# Altium PCB praline.PcbDoc (part 3 of 6)
Units mm, origin at the board's own origin, x right, y up, seen from the top; angles counter-clockwise.
Board outline 120 x 75 mm, 6 copper layers (F.Cu, In1.Cu, In2.Cu, In3.Cu, In4.Cu, B.Cu); 576 components, 429 nets, 2806 pads, 953 vias.
Unrouted connection lines stored in the file: 268.
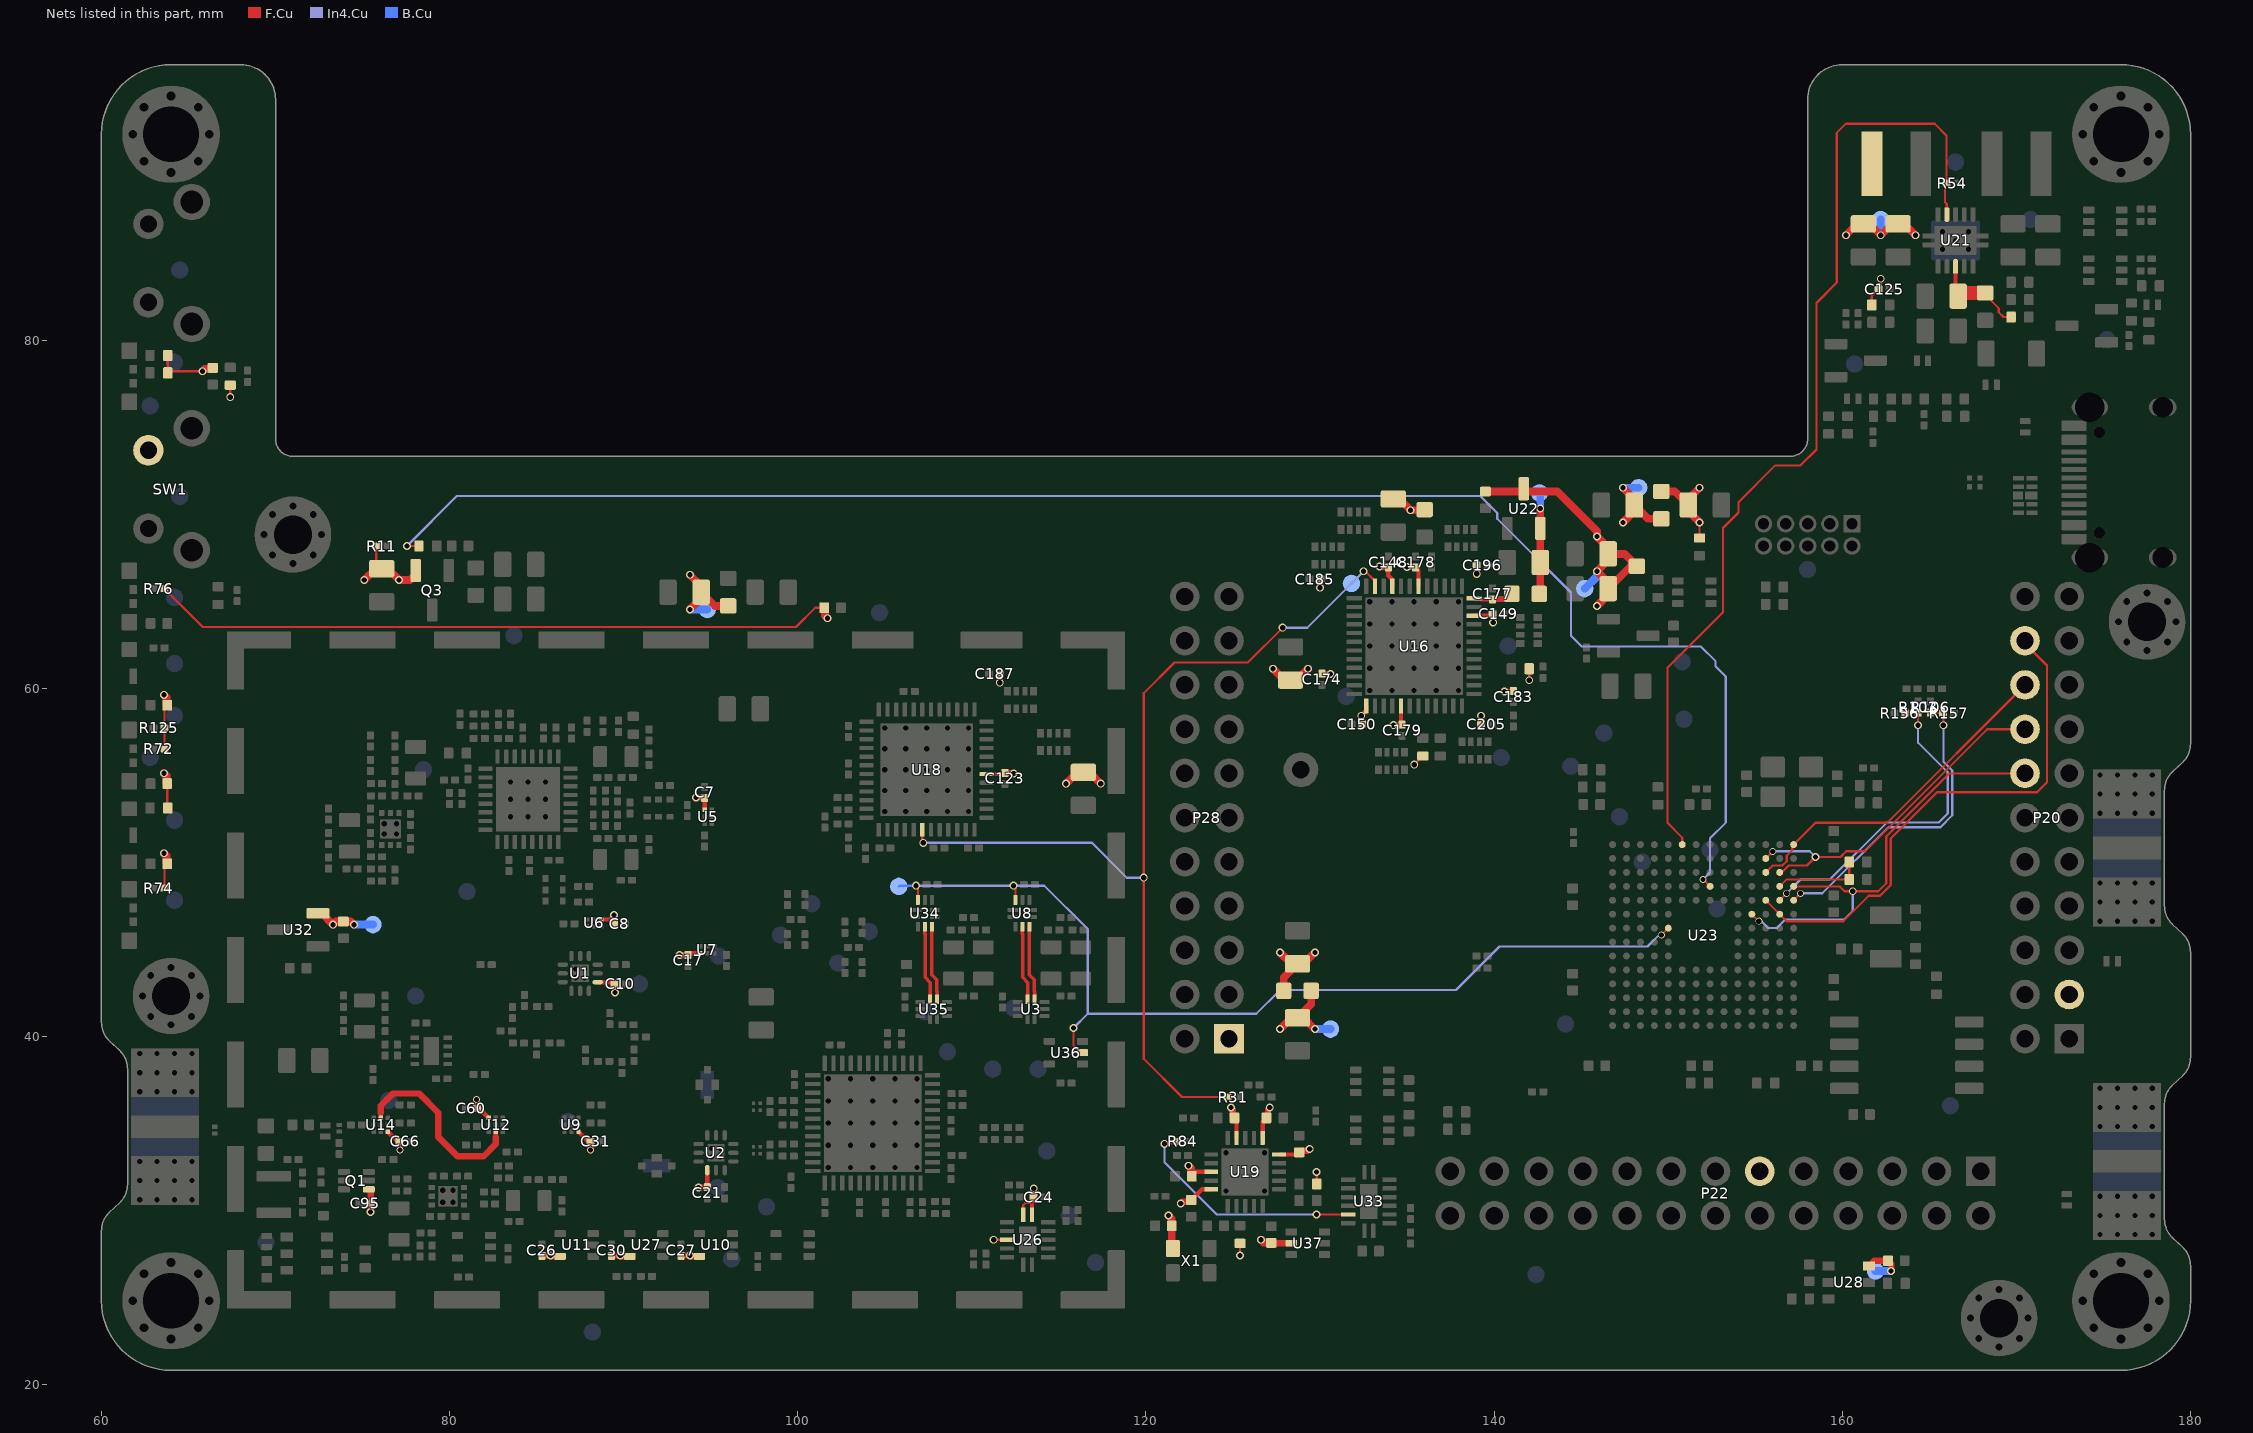
[diagram p6: the nets of this part, all layers, seen from the top]

## Via types
v1: diameter 0.45, hole 0.3, F.Cu to B.Cu, tented both sides, 751 vias
v2: diameter 0.4, hole 0.3, F.Cu to B.Cu, tented both sides, 119 vias
v3: diameter 0.7, hole 0.4, F.Cu to B.Cu, tented both sides, 83 vias

## Nets (pads, with @x,y where several pads share a name; then routed paths per layer and width w, separated by ;. In a path a pad name is that pad's centre, name@x,y a point inside that pad or via, vN(x,y) a via of type N, cw(c..) or ccw(c..) an arc to the next point about the centre after c; other vN are vias at no path point) (continued)
AMP_BYPASS: U12.2 U14.2 | length 10.9
  F.Cu w0.25: U14.2@76.05,35.32 76.05,35.62 ; 82.65,34.22 U12.2@82.65,34.52
  F.Cu w0.364: 76.05,35.62 76.05,36.02 76.75,36.72 78.25,36.72 79.35,35.62 79.35,34.22 80.45,33.12 81.95,33.12 82.65,33.82 82.65,34.22
AUX_CLK1: R84.1 U33.14 | length 13.6
  F.Cu w0.127: v1(121.07,33.83) 121.09,33.85 121.66,33.85 R84.1@121.78,33.97 ; v1(129.79,29.77) U33.14@131.613,29.77
  In4.Cu w0.127: v1(121.07,33.83) 121.07,32.76 124.06,29.77 v1(129.79,29.77)